# Altium PCB SE-HV00-02.PcbDoc
Units mm, origin at the board's own origin, x right, y up, seen from the top; angles counter-clockwise.
Board outline 120 x 99.9 mm, 2 copper layers (Top Layer, Bottom Layer); 131 components, 77 nets, 419 pads, 89 vias.
Unrouted connection lines stored in the file: 151.
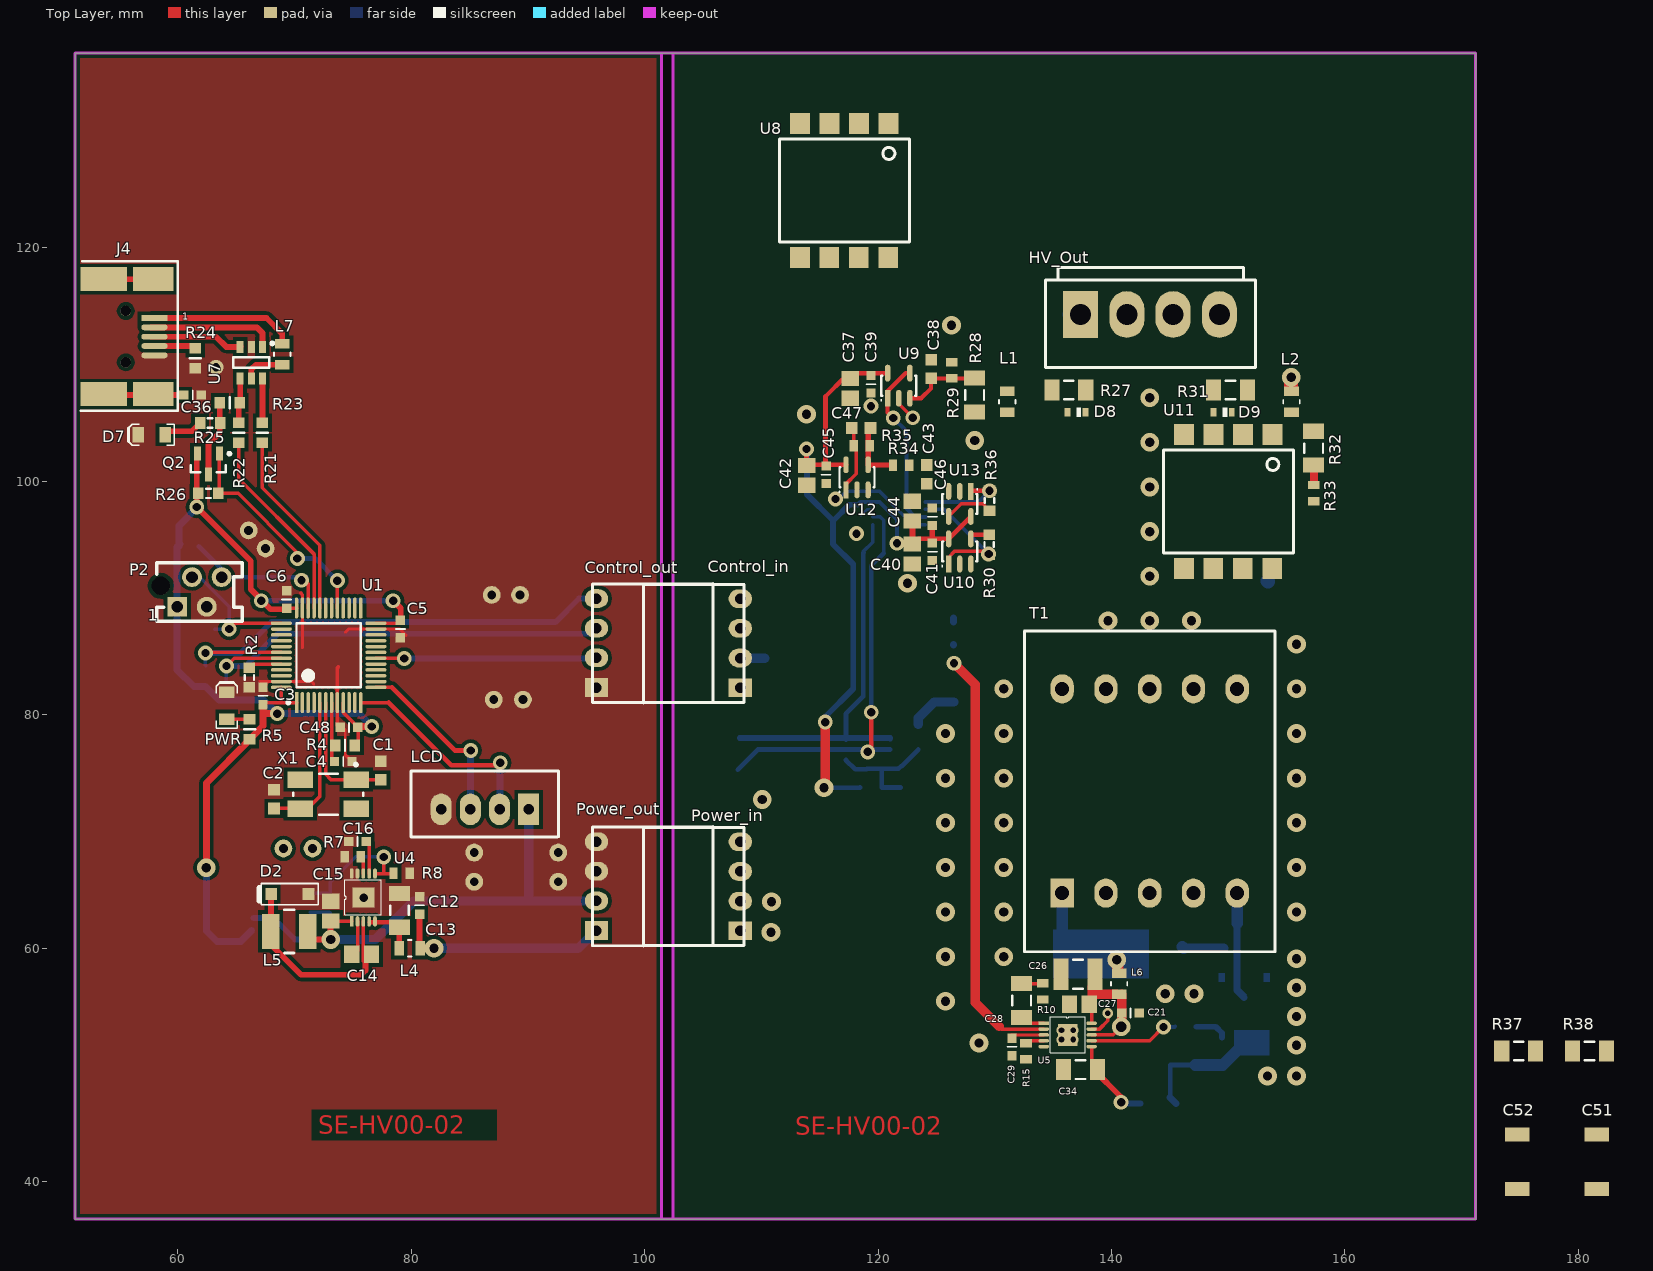
[diagram p0: Top Layer view]
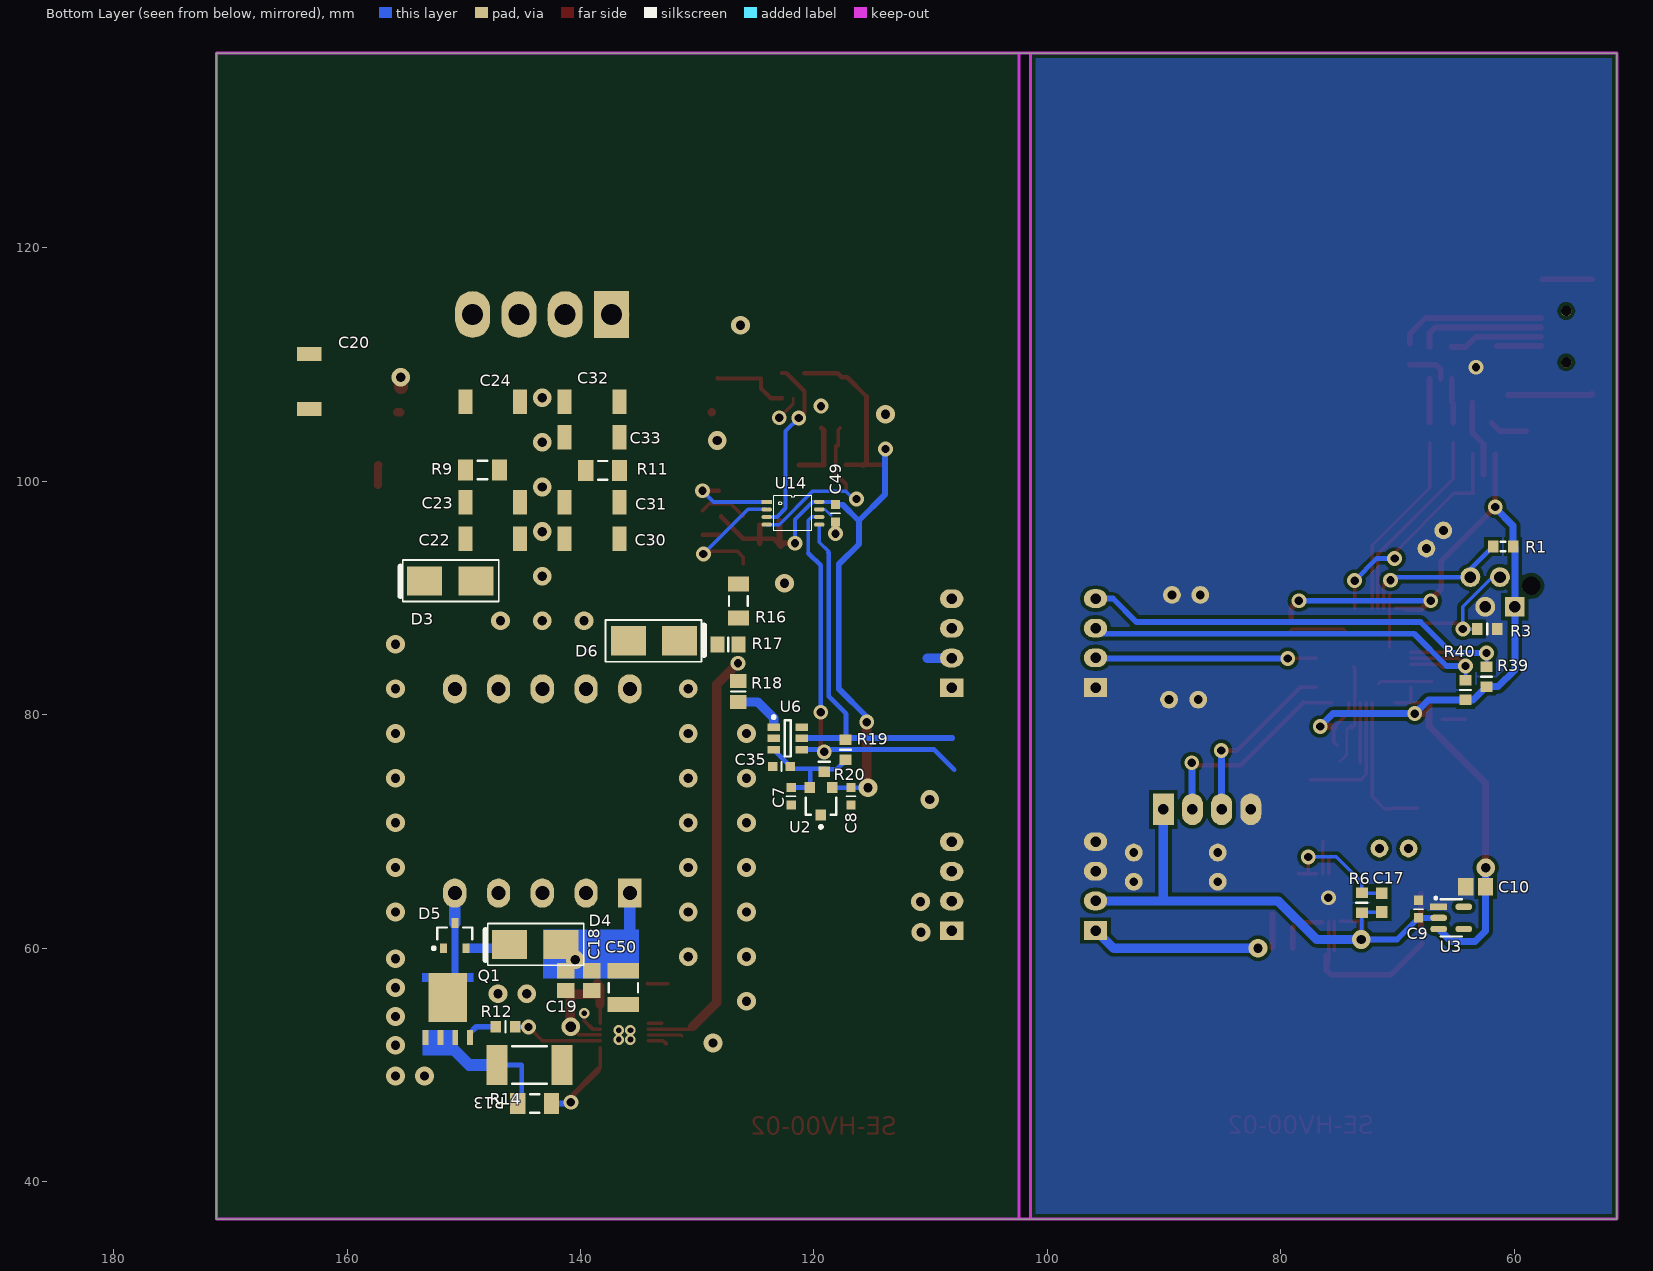
[diagram p1: Bottom Layer view, seen from below]
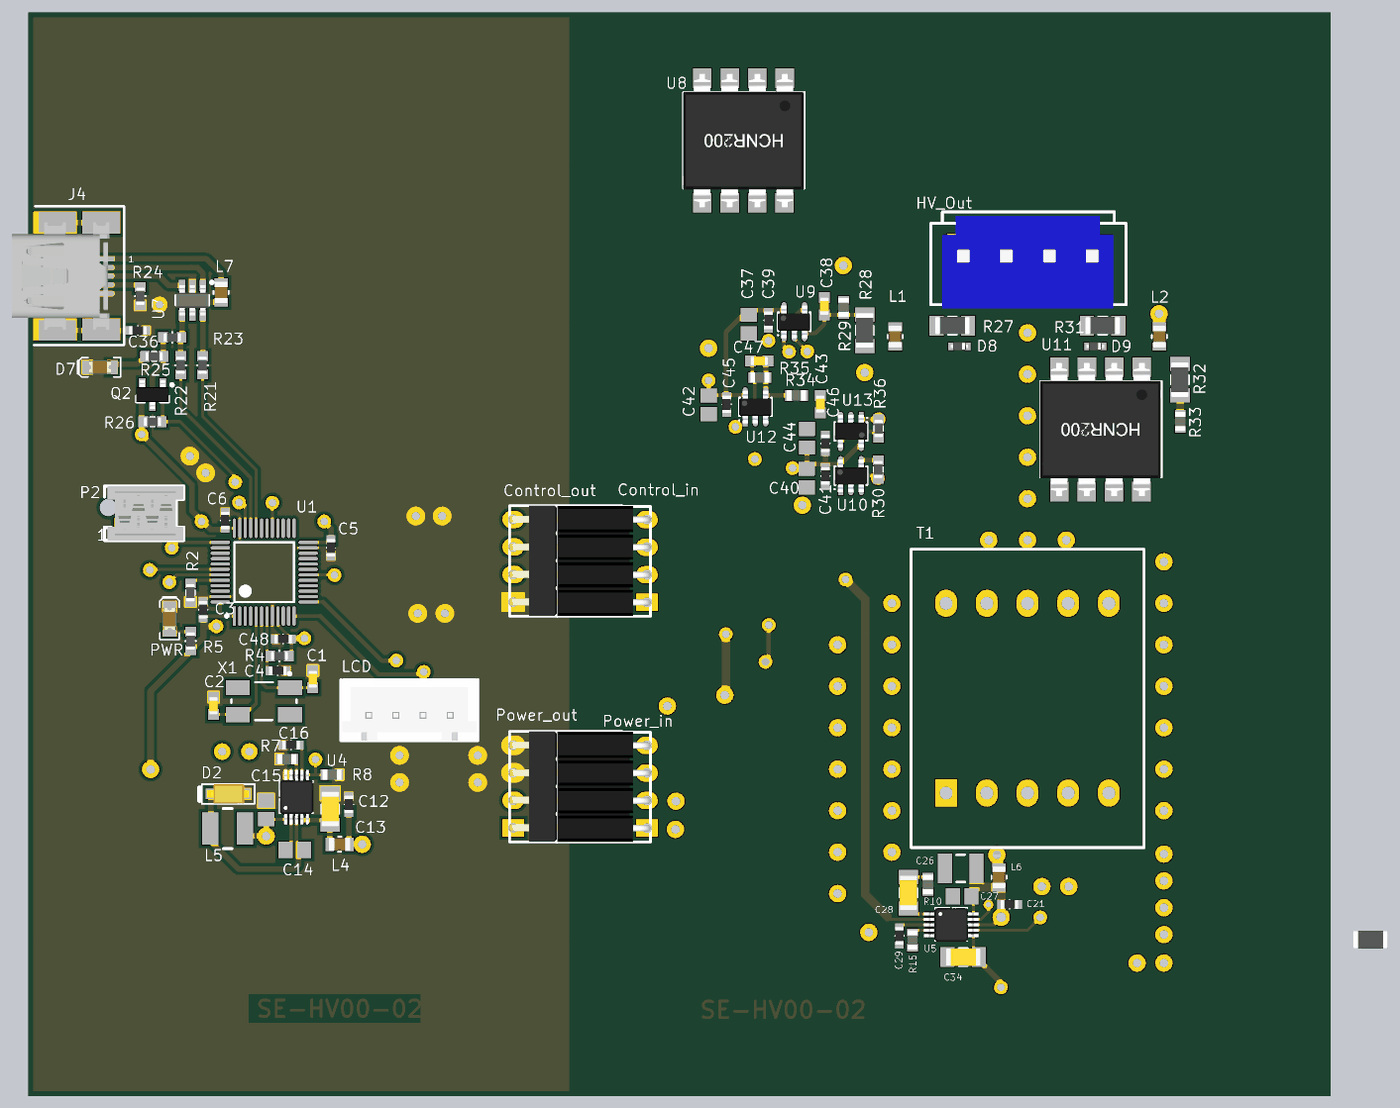
[diagram p2: 3D render of the assembled board from above, using the file's embedded part models]
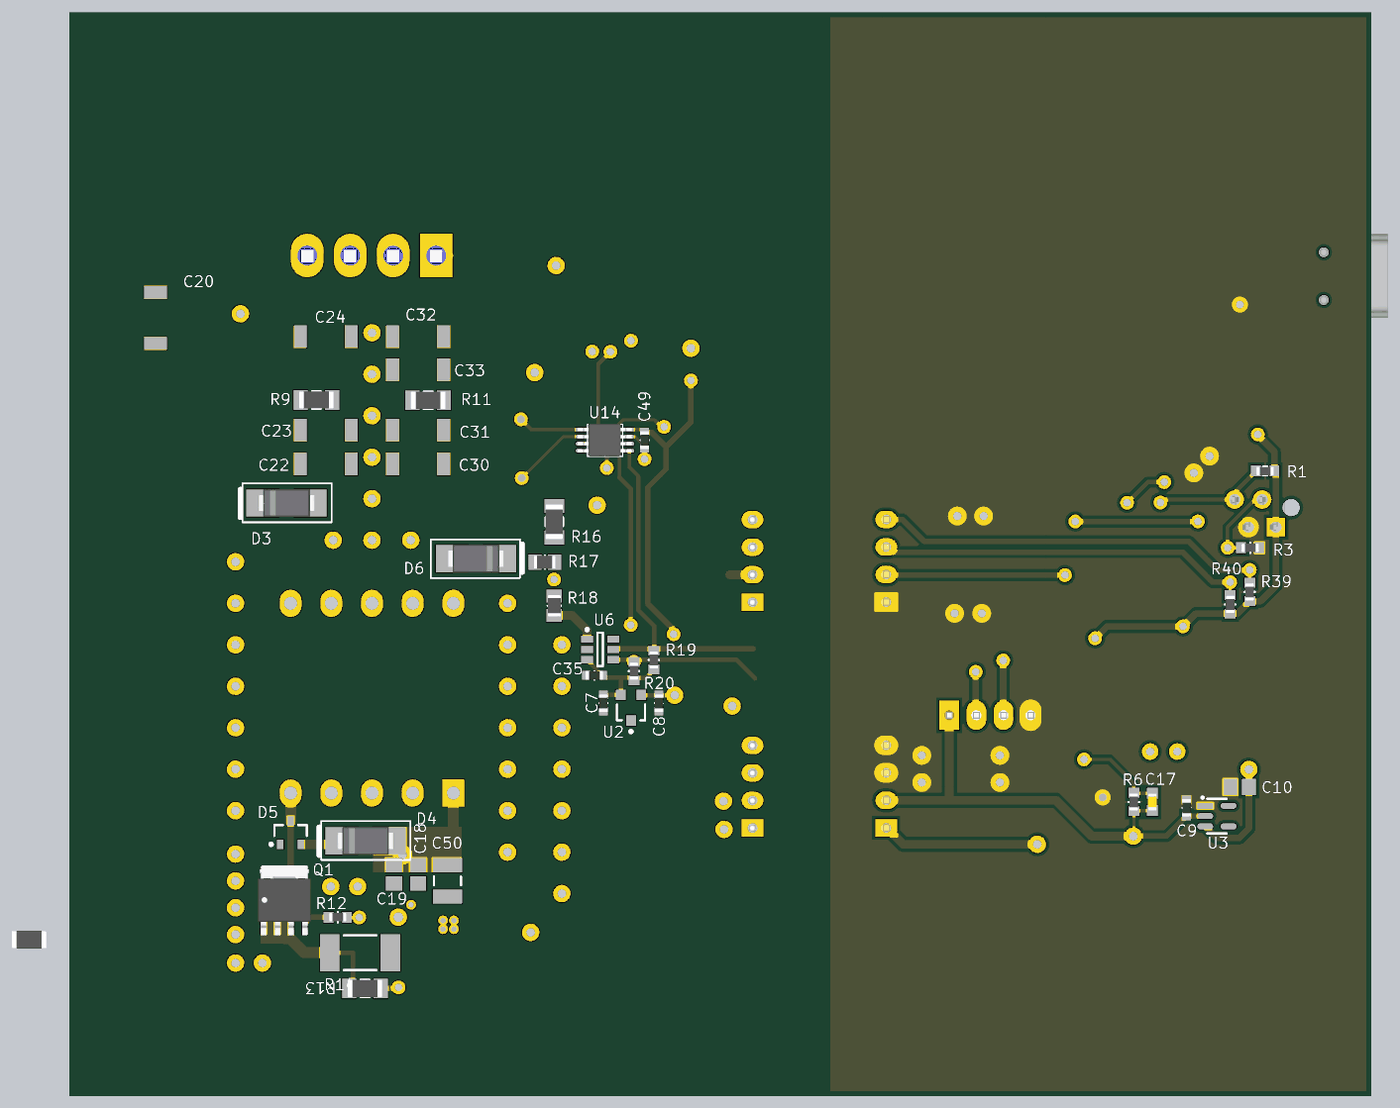
[diagram p3: 3D render of the assembled board from below, using the file's embedded part models]

## Layer stack, top to bottom
Top Solder: solder mask 0.0102, Solder Resist, Dk 3.5
Top Layer: signal copper 0.0356
Dielectric 1: dielectric 0.32, FR-4, Dk 4.8
Bottom Layer: signal copper 0.0356
Bottom Solder: solder mask 0.0102, Solder Resist, Dk 3.5

## Board outline
51.2,36.8 51.2,136.7 171.2,136.7 171.2,36.8
cut-out: 101.45,36.8 101.45,136.7 102.45,136.7 102.45,36.8

## Design rules (kind name [scope] priority, off if disabled: settings)
Clearance Clearance_1 [All vs InNetClass('HV')] p1: gap=0.1
Clearance Clearance_2 [All vs InNetClass('HV1')] p2: gap=0.1
Clearance [All] p3: gap=0.2
HoleSize [All] p1: absolutevalues=TRUE maxlimit=3 minlimit=0.025 maxpercent=80.000 minpercent=20.000
PlaneConnect [All] p1: planeconnectstyle=Relief reliefexpansion=0.508 reliefentries=4 reliefconductorwidth=0.454 reliefairgap=0.254
PolygonConnect [All] p1: connectstyle=Direct reliefconductorwidth=0.254 reliefentries=4 polygonreliefangle="90 Angle" airgapwidth=0.254
RoutingVias [All] p1: holewidth=0.711 width=1.27 viastyle="Through Hole" minholewidth=0.711 minwidth=1.27 maxholewidth=0.711 maxwidth=1.27
SolderMaskExpansion [All] p1: expansion=0.102
UnpouredPolygon [All] p1: allowunpoured=FALSE
Width [All] p1: maxlimit=3 minlimit=0.1 preferedwidth=0.254 minimp=50.000000 maximp=50.000000 favimp=50.000000
27 further rules are at their usual default settings.

## Classes and differential pairs
component class USB: C36 D7 J4 L7 Q2 R21 R22 R23 R24 R25 R26 U7
component class Step_Down: C12 C13 C14 C15 C16 C17 D2 L4 L5 R6 R7 R8 U4
component class SE-HV00-02: C20 C33 Control_in Control_out HV_Out L1 L2 LCD Power_in Power_out
component class Current_Voltage_measure: C37 C38 C39 C40 C41 C42 C43 C44 C45 C46 C47 C49 C51 C52 D8 D9 R28 R29 R30 R32 R33 R34 R35 R36 U8 U9 U10 U11 U12 U13 U14
component class Control: C1 C2 C3 C4 C5 C6 C9 C10 C48 P2 PWR R1 R2 R3 R4 R5 R39 R40 U1 U3 X1
net class HV: NetC20_2 NetC22_2 NetC24_2 NetC33_2 NetC51_2 NetC52_2 NetD3_2 NetD8_2 NetD9_1 NetR16_1
net class HV1: NetC30_2 NetC32_2 NetD6_1
component class High_Voltage_Converter: C7 C8 C18 C19 C21 C22 C23 C24 C26 C27 C28 C29 C30 C31 C32 C34 C35 C50 D3 D4 D5 D6 L6 Q1 R9 R10 R11 R12 R13 R14 R15 R16 R17 R18 R19 R20 R27 R31 R37 R38 T1 U2 U5 U6

## Components (designator, comment, footprint, x,y, rotation, side; value= is the part's Value field where it differs from the comment)
C1 "18pF" CAPC1608N 77.4,75.225 r270 top
C2 "18pF" CAPC1608N 68.25,72.775 r270 top
C3 "100nF" C0603V 67.3,81.625 r270 top
C4 "100nF" C0603V 74.175,76 r180 top
C5 "100nF" C0603V 79.075,87.35 r90 top
C6 "100nF" C0603V 69.325,89.875 r270 top
C7 "100nF" C0603V 121.95,73.025 r90 bottom
C8 "100nF" C0603V 116.825,73.025 r90 bottom
C9 "100nF" C0603V 68.2,63.35 r270 bottom
C10 "1uF" CAPC2012N 63.3,65.275 r180 bottom
C12 "100nF" C0603V 80.725,63.675 r270 top
C13 "10uF" CAPC3216N 79,63.25 r90 top
C14 "0.47uF" CAPC2012N 75.75,59.475 r180 top
C15 "47uF" CAPC2012N 73.1,63.175 r270 top
C16 "100nF" C0603V 75.4,69.15 r0 top
C17 "10pF" CAPC1608N 71.35,63.9 r270 bottom
C18 "1uF" CAPC2012N 139.025,57.225 r270 bottom
C19 "1uF" CAPC2012N 141.25,57.225 r270 bottom
C20 "100nF" C1808 163.225,108.55 r90 bottom
C21 "100nF" C0603V 141.625,54.45 r180 top
C22 "100nF" C1808 147.525,95.075 r0 bottom
C23 "100nF" C1808 147.525,98.2 r0 bottom
C24 "100nF" C1808 147.525,106.825 r0 bottom
C26 "47uF" CAPC3225N 137.125,57.775 r180 top
C27 "1uF" CAPC2012N 137.25,55.2 r180 top
C28 "680pF" CAPC3216N 132.3,55.525 r270 top
C29 "100nF" C0603V 131.475,51.55 r270 top
C30 "100nF" C1808 139.025,95.075 r180 bottom
C31 "100nF" C1808 139.025,98.2 r180 bottom
C32 "100nF" C1808 139.025,106.825 r180 bottom
C33 "100nF" C1808 139.025,103.775 r180 bottom
C34 "10nF" CAPC3216N 137.35,49.6 r0 top
C35 "100nF" C0603V 122.775,75.575 r180 bottom
C36 "100nF" C0603V 61.275,107.4 r180 top
C37 "1uF" CAPC2012N 117.6,107.975 r270 top
C38 "10pF" CAPC1608N 124.55,109.625 r270 top
C39 "100nF" C0603V 119.4,108.325 r90 top
C40 "1uF" CAPC2012N 122.925,93.775 r270 top
C41 "100nF" C0603V 124.65,93.975 r90 top
C42 "1uF" CAPC2012N 113.9,100.525 r270 top
C43 "10pF" CAPC1608N 124.175,100.6 r90 top
C44 "1uF" CAPC2012N 122.95,97.45 r90 top
C45 "100nF" C0603V 115.55,100.575 r90 top
C46 "100nF" C0603V 124.65,96.975 r270 top
C47 "10pF" CAPC1608N 118.55,104.575 r0 top
C48 "100nF" C0603V 74.675,78.925 r0 top
C49 "100nF" C0603V 118.15,97.275 r270 bottom
C50 "47uF" CAPC3225N 136.325,56.625 r90 bottom
C51 "100nF" C1808 181.559,41.702 r90 top
C52 "100nF" C1808 174.784,41.702 r90 top
Control_in "4 Pin Socket" "RA SOCKET 4 PIN" 108.2,82.325 r90 top
Control_out "HDR 4 Pin" "RA HDR 4PIN" 95.875,86.15 r90 top
D2 "PMEG3010ER" SOD123 69.6,64.65 r0 top
D3 "STTH1R06A" DO-214AC 151.15,91.475 r0 bottom
D4 "SMAJ300A" DO-214AC 143.875,60.325 r0 bottom
D5 "BAV99" SOT95P240-3L 150.775,61.075 r90 bottom
D6 "STTH1R06A" DO-214AC 133.7,86.35 r180 bottom
D7 "KPHCM-2012SGC-T" D0805 57.775,104 r180 top
D8 "BAS516" SOD523 137,105.925 r0 top
D9 "BAS516" SOD523 149.525,105.925 r0 top
HV_Out "HDR 4" HDR1X4_3M96V 143.3,114.3 r0 top
J4 "USB MINI-B" MOLEX_MINI_USB-B 55.825,112.4 r0 top
L1 "" LL0805\2P 131.075,106.825 r90 top
L2 "" LL0805\2P 155.425,106.825 r90 top
L4 "FB 1.5k 1A" LL0805\2P 79.875,60 r180 top
L5 "10uH" L1515 69.55,61.45 r0 top
L6 "FB 1.5k 1A" LL0805\2P 140.65,56.95 r90 top
L7 "" LL0805\2P 68.95,110.9 r90 top
LCD "B4B-XH-A" B4B-XH-A 88.8,71.9 r180 top
P2 "7-215079-4" ZIP-T4 62.425,90.525 r0 top
Power_in "4 Pin Socket" "RA Socket 4 pin" 108.2,61.5 r90 top
Power_out "HDR 4 Pin" "RA HDR 4PIN" 95.875,65.325 r90 top
PWR "KPHCM-2012SGC-T" D0805 64.2,80.775 r90 top
Q1 "PSMN069-100YS" SOT669 151.375,55.05 r180 bottom
Q2 "NDS332P" SOT23-3L 62.625,101.475 r270 top
R1 "10k" RESC1608N 60.95,94.425 r0 bottom
R2 "100k" RESC1608N 66.125,83.2 r270 top
R3 "10k" RESC1608N 62.325,87.35 r180 bottom
R4 "100k" RESC1608N 74.325,77.375 r0 top
R5 "100R" RESC1608N 66.15,78.75 r270 top
R6 "1M6" RESC1608N 73.05,63.9 r270 bottom
R7 "118k" RESC1608X50N 75,67.85 r180 top
R8 "309k" RESC1608X50N 79.175,66.425 r180 top
R9 "75R" RESC3216N 148.4,100.975 r180 bottom
R10 "22k" RESC1608X50N 134.1,56.3 r90 top
R11 "75R" RESC3216N 138.1,100.95 r0 bottom
R12 "10R" RESC1608N 146.425,53.275 r0 bottom
R13 "22R" RESC3216N 143.925,46.7 r0 bottom
R14 "0R05" RESC6432AN 144.375,50 r0 bottom
R15 "140k" RESC1608X50N 132.675,51.175 r90 top
R16 "1M2" RESC3216N 126.475,89.75 r90 bottom
R17 "11k3" RESC2012N 127.35,86.025 r180 bottom
R18 "15k" RESC2012N 126.475,82 r90 bottom
R19 "10k" RESC1608N 117.3,77 r270 bottom
R20 "10k" RESC1608N 119.125,75.975 r270 bottom
R21 "22R" RESC1608N 67.25,104.175 r270 top
R22 "22R" RESC1608N 65.225,104.175 r270 top
R23 "1k0" RESC1608N 64.45,106.75 r0 top
R24 "100k" RESC1608N 61.5,110.55 r90 top
R25 "1k0" RESC1608N 62.775,105 r0 top
R26 "10k" RESC1608N 62.625,98.975 r180 top
R27 "75R" RESC3216N 136.35,107.825 r0 top
R28 "1M2" RESC3216N 128.275,107.4 r270 top
R29 "12k" RESC1608X50N 126.325,109.525 r270 top
R30 "30k" RESC1608N 129.525,94.575 r270 top
R31 "75R" RESC3216N 150.2,107.825 r180 top
R32 "1M2" RESC3216N 157.325,102.85 r90 top
R33 "14k" RESC1608X50N 157.35,99 r90 top
R34 "100k" RESC1608X50N 121.975,101.4 r0 top
R35 "100k" RESC1608X50N 118.6,103.05 r180 top
R36 "30k" RESC1608N 129.55,98.35 r90 top
R37 "75R" RESC3216N 174.884,51.202 r0 top
R38 "75R" RESC3216N 180.959,51.202 r0 top
R39 "10k" RESC1608N 62.375,83.275 r90 bottom
R40 "10k" RESC1608N 64.175,82.125 r90 bottom
T1 "EFD20" EFD_20 143.275,73.475 r0 top
U1 "STM32F103C6T6" LQFP48_N 72.925,85.1 r90 top
U2 "MAX6104EUR+T" SOT23-3 118.45,73.775 r0 bottom
U3 "TLV70433DBVT" SO-G5/P.95 65.4,62.6 r270 bottom
U4 "LT3991" "10-LEAD PLASTIC MSOP - DUPLICATE" 74.9,62.3 r90 top
U5 "LT3757" "10-LEAD PLASTIC MSOP - DUPLICATE" 134.2,53.575 r0 top
U6 "MCP4725A0T-E/CH" SOT-23-CH6_N 122.25,77.975 r180 bottom
U7 "USBLC6-2SC6" SOT95P280X145-6N 66.3,110.175 r270 top
U8 "6N136" SMP-8 120.9,130.65 r270 top
U9 "MCP6001T-I/OT" SO-G5/X.45 121.775,108.2 r0 top
U10 "MCP6001T-I/OT" SO-G5/X.45 127,94 r0 top
U11 "6N136" SMP-8 153.8,104 r270 top
U12 "MCP6001T-I/OT" SO-G5/X.45 118.2,100.35 r0 top
U13 "MCP6001T-I/OT" SO-G5/X.45 127,98.075 r180 top
U14 "MAX11612EUA" UMAX-8 124.05,98.25 r180 bottom
X1 "8 MHz" 2SMX-3SMXB 72.9,73.2 r180 top

## Footprints (in the part's own frame and the unit in brackets; to place one, negate y for a bottom-side part, rotate by r counter-clockwise, add the part's x,y. Pads: shape width x height; smd on the part's side, far side on the other; paste and mask are expansions set on the pad)
2SMX-3SMXB [mm] "Quartz Crystal, SM; Body 6.0 x 3.5 mm (LxW)"
  rect 2.2x1.4 smd: 1(-2.4,-1.25) 2(2.4,-1.25) 3(2.4,1.25) 4(-2.4,1.25)
  silkscreen extent -3,-2.66 3,1.75, body extent -3.01,-1.76 3.01,1.76, height 1
"10-LEAD PLASTIC MSOP - DUPLICATE" [mm] "MSOP_10"
  rect 0.889x0.305 smd: 1(0,0)
  oval 0.889x0.305 smd: 2(0,-0.5) 3(0,-1) 4(0,-1.5) 5(0,-2) 6(4.1,-2) 7(4.1,-1.5) 8(4.1,-1) 9(4.1,-0.5) 10(4.1,0)
  rect 1.68x1.88 smd: GND(2.05,-1)
  silkscreen extent 0.55,-2.52 3.55,0.58, body extent -0.47,-2.55 4.57,0.55, height 1.11
B4B-XH-A [mm]
  rect 1.8x2.7 hole 0.9: 1(-1.27,0)
  oval 1.8x2.7 hole 0.9: 2(1.23,0) 3(3.73,0) 4(6.23,0)
  silkscreen extent -3.81,-3.3 8.81,2.35, body extent -3.71,-3.4 8.69,2.35, height 7
C0603V [mm]
  rect 0.8x0.8 smd paste+0 mask+0.05: 1(-0.75,0) 2(0.75,0)
  silkscreen extent 0,-0.4 0,0.4, body extent -0.8,-0.4 0.8,0.4, height 0.4
C1808 [mm]
  rect 1.2x2.1 smd paste-0.02 mask+0.075: 1(-2.35,0) 2(2.35,0)
CAPC1608N [mm] "Chip Capacitor, Body 1.6x0.8mm(0603), IPC Medium Density"
  rect 1x1 smd: 1(-0.8,0) 2(0.8,0)
  body extent -0.8,-0.4 0.8,0.4, height 0.55
CAPC2012N [mm] "Chip Capacitor, Body 2.0x1.3mm(C0805), IPC Medium Density"
  rect 1.3x1.5 smd: 1(-0.85,0) 2(0.85,0)
  body extent -1.1,-0.72 1.1,0.72, height 1.1
CAPC3216N [mm] "Chip Capacitor, Body 3.2x1.6mm, IPC Medium Density"
  rect 1.3x1.8 smd: 1(-1.45,0) 2(1.45,0)
  silkscreen extent -0.4,-0.8 0.4,0.8, body extent -1.6,-0.8 1.6,0.8, height 0.7
CAPC3225N [mm] "Chip Capacitor, Body 3.2x2.5mm, IPC Medium Density"
  rect 1.3x2.7 smd: 1(-1.45,0) 2(1.45,0)
  silkscreen extent -0.4,-1.25 0.4,1.25, body extent -1.7,-1.35 1.7,1.35, height 1.35
D0805 [mm]
  rect 1x1.3 smd paste-0.02 mask+0.05: 1(-1.15,0) 2(1.15,0)
  silkscreen extent -1.91,-0.89 2,0.89, body extent -1.01,-0.62 1.01,0.63, height 1.1
DO-214AC [mm] "(HSMA) (High Profile)"
  rect 3x2.5 smd: 1(-2.2,0) 2(2.2,0)
  silkscreen extent -4.15,-1.8 4.27,1.78, body extent -2.6,-1.3 2.6,1.3, height 2.4
EFD_20 [mm] "EFD20"
  rect 2x2.5 hole 1.2: 1(-7.5,-8.75)
  oval 2x2.5 hole 1.2: 2(-3.75,-8.75) 3(0,-8.75) 4(3.75,-8.75) 5(7.5,-8.75) 6(7.5,8.75) 7(3.75,8.75) 8(0,8.75) 9(-3.75,8.75) 10(-7.5,8.75)
  silkscreen extent -10.73,-13.77 10.75,13.72, body extent -10.7,-13.77 10.7,13.73, height 11.02
HDR1X4_3M96V [mm]
  rect 3x4 hole 1.8: 1(-5.94,0)
  oval 3x4 hole 1.8: 2(-1.98,0) 3(1.98,0) 4(5.94,0)
  silkscreen extent -8.94,-4.53 9.06,4.03, body extent -7.89,-4.86 7.89,3.64, height 10.9
L1515 [mm] "(3030 metric)"
  rect 1.5x3 smd: 1(-1.6,0) 2(1.6,0)
  silkscreen extent -0.4,-1.85 0.4,1.85
LL0805\2P [mm]
  rect 0.8x1.25 smd: 1(-0.9,0) 2(0.9,0)
  silkscreen extent -0.15,-0.7 0.15,0.7, body extent -1,-0.6 1,0.6, height 0.95
LQFP48_N [mm] "Thin QFP, 48-Leads, Body 7x7mm, Pitch 0.5mm, IPC Medium Density"
  rect 1.8x0.3 smd: 1(-4.05,2.75)
  oval 1.8x0.3 smd: 2(-4.05,2.25) 3(-4.05,1.75) 4(-4.05,1.25) 5(-4.05,0.75) 6(-4.05,0.25) 7(-4.05,-0.25) 8(-4.05,-0.75) 9(-4.05,-1.25) 10(-4.05,-1.75) 11(-4.05,-2.25) 12(-4.05,-2.75) 25(4.05,-2.75) 26(4.05,-2.25) 27(4.05,-1.75) 28(4.05,-1.25) 29(4.05,-0.75) 30(4.05,-0.25) 31(4.05,0.25) 32(4.05,0.75) 33(4.05,1.25) 34(4.05,1.75) 35(4.05,2.25) 36(4.05,2.75)
  oval 0.3x1.8 smd: 13(-2.75,-4.05) 14(-2.25,-4.05) 15(-1.75,-4.05) 16(-1.25,-4.05) 17(-0.75,-4.05) 18(-0.25,-4.05) 19(0.25,-4.05) 20(0.75,-4.05) 21(1.25,-4.05) 22(1.75,-4.05) 23(2.25,-4.05) 24(2.75,-4.05) 37(2.75,4.05) 38(2.25,4.05) 39(1.75,4.05) 40(1.25,4.05) 41(0.75,4.05) 42(0.25,4.05) 43(-0.25,4.05) 44(-0.75,4.05) 45(-1.25,4.05) 46(-1.75,4.05) 47(-2.25,4.05) 48(-2.75,4.05)
  silkscreen extent -4.17,-2.75 2.75,3.57, body extent -3.5,-3.5 3.5,3.5, height 1.6
MOLEX_MINI_USB-B [mm]
  rect 2.25x0.5 smd paste-0.02 mask+0.025: 1(2.175,1.6)
  oval 2.25x0.5 smd paste-0.02 mask+0.025: 2(2.175,0.8) 3(2.175,0) 4(2.175,-0.8) 5(2.175,-1.6)
  rect 3.5x2.05 smd paste-0.02 mask+0.075: 6(2.075,-4.925) 8(2.075,4.925)
  rect 4x2.05 smd paste-10 mask+0.075: 7(-2.175,-4.925) 9(-2.175,4.925)
  round 0.9 / inner round 1.2 / far side round 0.9 hole 0.9 unplated: H1(-0.275,2.2) H2(-0.275,-2.2)
  silkscreen extent -4.13,-6.35 4.18,6.45, body extent -6.17,-4.95 2.83,4.95, height 3.96
"RA HDR 4PIN" [mm]
  rect 1.6x2 hole 0.9: 1(-3.81,0)
  oval 1.6x2 hole 0.9: 2(-1.27,0) 3(1.27,0) 4(3.81,0)
  silkscreen extent -5.11,-9.98 5.09,0.34, body extent -5.07,-10.02 5.09,0.34, height 3.04
"RA SOCKET 4 PIN" [mm]
  rect 1.6x2 hole 0.9: 1(0,0)
  oval 1.6x2 hole 0.9: 2(2.54,0) 3(5.08,0) 4(7.62,0)
  silkscreen extent -1.3,-0.32 8.86,8.28, body extent -1.28,-0.32 8.88,8.28, height 3.27
"RA Socket 4 pin" [mm]
  rect 1.6x2 hole 0.9: 1(0,0)
  oval 1.6x2 hole 0.9: 2(2.54,0) 3(5.08,0) 4(7.62,0)
  silkscreen extent -1.3,-0.32 8.86,8.28, body extent -1.28,-0.32 8.88,8.28, height 3.27
RESC1608N [mm] "Chip Resistor, Body 1.6x0.8mm, IPC Medium Density"
  rect 0.9x1 smd: 1(-0.85,0) 2(0.85,0)
  silkscreen extent -0.2,-0.4 0.2,0.4, body extent -0.8,-0.4 0.8,0.4, height 0.38
RESC1608X50N [mm] "Chip Resistor, EIA 0603, Metric 1608, Body 1.6x0.8mm, IPC Medium Density"
  rect 0.72x0.99 smd: 1(-0.69,0) 2(0.69,0)
  body extent -0.87,-0.47 0.88,0.48, height 0.5
RESC2012N [mm] "Chip Resistor, Body 2.0x1.3mm, IPC Medium Density"
  rect 1.2x1.4 smd: 1(-0.9,0) 2(0.9,0)
  silkscreen extent 0,-0.6 0,0.6, body extent -1,-0.6 1,0.6, height 0.5
RESC3216N [mm] "Chip Resistor, Body 3.2x1.6mm, IPC Medium Density"
  rect 1.3x1.8 smd: 1(-1.45,0) 2(1.45,0)
  silkscreen extent -0.4,-0.8 0.4,0.8, body extent -1.6,-0.8 1.6,0.8, height 0.6
RESC6432AN [mm] "Chip Resistor, Body 6.4x3.2mm, IPC Medium Density"
  rect 1.8x3.4 smd: 1(-2.8,0) 2(2.8,0)
  silkscreen extent -1.5,-1.6 1.5,1.6, body extent -3.32,-1.73 3.32,1.73, height 1.1
SMP-8 [mm] "8 pin DIP surface mount package"
  rect 1.8x1.7 smd: 1(0,0) 2(0,-2.525) 3(0,-5.05) 4(0,-7.6) 5(11.475,-7.6) 6(11.475,-5.075) 7(11.475,-2.55) 8(11.475,-0.025)
  silkscreen extent 1.33,-9.33 10.12,1.8, body extent -0.4,-9.37 11.9,1.78, height 4.75
SO-G5/P.95 [mm] "SOT-23/SC-74A; 5 Leads; Body 3.1 x 3 mm, inc. leads (LxW max)"
  rect 0.55x1.45 smd: 1(-0.95,-1.075)
  oval 0.55x1.45 smd: 2(0,-1.075) 3(0.95,-1.075) 4(0.95,1.075) 5(-0.95,1.075)
  silkscreen extent -1.8,-1.42 1.6,0.9, body extent -1.45,-0.8 1.45,0.8, height 1.45
SO-G5/X.45 [mm] "SOT-23/SC-74A; 5 Leads; Body 3.1 x 3 mm, inc. leads (LxW max)"
  rect 0.45x1.45 smd: 1(-0.95,-1.075)
  oval 0.45x1.45 smd: 2(0,-1.075) 3(0.95,-1.075) 4(0.95,1.075) 5(-0.95,1.075)
  silkscreen extent -1.55,-1.3 1.5,0.85, body extent -1.5,-1.52 1.5,1.48, height 1.3
SOD123 [mm]
  rect 1x1 smd paste-0.02 mask+0.05: 1(1.6,0) 2(-1.6,0)
  silkscreen extent -2.63,-0.91 2.44,0.89, body extent -1.95,-0.9 1.95,0.9, height 1.29
SOD523 [mm]
  rect 0.5x0.7 smd: 1(-0.775,0) 2(0.775,0)
  silkscreen extent 0,-0.4 0.4,0.4, body extent -0.8,-0.4 0.8,0.4, height 0.7
SOT23-3 [mm]
  rect 0.9x0.95 smd: 1(0,0) 2(1.9,0) 3(0.95,2.35)
  silkscreen extent -0.35,0.87 2.25,3.5
SOT23-3L [mm] "SOT23, 3-Leads, Body 2.9x1.3mm, Pitch 0.95mm, Lead Span 2.5mm, IPC High Density"
  rect 1.2x0.6 smd: 1(-0.9,0.95) 2(-0.9,-0.95) 3(0.9,0)
  silkscreen extent -1.02,-1.5 0.7,1.93, body extent -1.32,-1.5 1.32,1.5, height 1.08
SOT95P240-3L [mm] "SOT23, 3-Leads, Body 2.9x1.3mm, Pitch 0.95mm, Lead Span 2.4mm, IPC High Density"
  rect 0.85x0.6 smd: 1(-1.075,0.95) 2(-1.075,-0.95) 3(1.075,0)
  silkscreen extent -1.2,-1.5 0.7,1.93, body extent -0.7,-1.5 0.7,1.5, height 1.12
SOT95P280X145-6N [mm] "SOT23, 6-Leads, Body 1.6x3.0mm, Pitch 0.95mm, IPC Medium Density"
  rect 1.05x0.6 smd: 1(-1.35,0.95) 2(-1.35,0) 3(-1.35,-0.95) 4(1.35,-0.95) 5(1.35,0) 6(1.35,0.95)
  silkscreen extent -1.77,-1.55 0.45,1.92, body extent -1.4,-1.5 1.4,1.5, height 1.45
SOT669 [mm]
  rect 0.5x1.3 smd: 1(-1.905,-2.7) 2(-0.635,-2.7) 3(0.635,-2.7) 4(1.905,-2.7)
  rect 3.3x4.2 smd: 5(0,0.75)
  Top Layer region: 1.65,2.85 2.205,2.85 2.205,2.05 1.65,2.05
  Top Layer region: -2.205,2.85 -1.65,2.85 -1.65,2.05 -2.205,2.05
  body extent -2.43,-3.43 2.47,3, height 1.15
SOT-23-CH6_N [mm] "SOT23, 6-Leads, Body 2.9x1.6mm, Pitch 0.95mm, Lead Span 2.7mm, IPC Medium Density"
  rect 1.1x0.65 smd: 1(-1.2,0.95) 2(-1.2,0) 3(-1.2,-0.95) 4(1.2,-0.95) 5(1.2,0) 6(1.2,0.95)
  silkscreen extent -1.33,-1.55 0.25,1.95, body extent -0.9,-1.55 0.9,1.55, height 1.45
UMAX-8 [mm]
  rect 0.9x0.35 smd: 1(0,0)
  oval 0.9x0.35 smd: 2(0,-0.65) 3(0,-1.3) 4(0,-1.95) 5(4.5,-1.95) 6(4.5,-1.3) 7(4.5,-0.65) 8(4.5,0)
  silkscreen extent 0.63,-2.47 3.88,0.5, body extent -0.28,-2.47 4.73,0.53, height 0.95
ZIP-T4 [mm] "In-Line; 6 Zig-Zag Leads; Body 20 x 3.25mm; Pitch 1.7 mm"
  rect 1.7x1.7 hole 1: 1(-2.475,-1.27)
  round 1.7 hole 1: 2(-1.205,1.27) 3(0.065,-1.27) 4(1.335,1.27)
  round 1.5 hole 1.6 unplated: 20(-3.875,0.53)
  silkscreen extent -4.22,-2.5 3.08,2.5, body extent -3.96,-2.5 3.05,2.5, height 4

## Part data
C1 C2: library part C0000124, "MLCC, 18 pF, ± 5%, C0G / NP0, 50 V, 0603"
C3 C4 C5 C6 C7 C8 C9 C12 C16 C21 C29 C35 C36 C39 C41 C45 C46 C48 C49: library part C0000005, "MLCC, 0.1uF 16V 10% X7R 0603"
C10 C18 C19 C27: library part C0000037, "MLCC, 0805, X5R, 16V, 1UF"
C13: library part C0000006, "MLCC, 10uF, 16V, 10%, 1206"
C14: library part C0000094, "MLCC,0.47uF,50V, 0805,"
C15: library part C0000094, "MLCC,47uF,50V, 0805,"
C17 C38 C43 C47: library part C0000042, "MLCC, 0603, NP0, 50V, 10PF"
C20 C22 C23 C24 C30 C31 C32 C33 C51 C52: library part C0000111, "MLCC, X7R, 100NF, 630V, 1808"
C26 C50: library part C0000077, "MLCC, 1210, 47uF, 16V"
C28: library part C0000056, "MLCC, 680PF, 630V, C0G/NP0, 1206"
C34: library part C0000012, "MLCC, 10nF, 630V, ±10% ,X7R, 1206"
C37 C40 C42 C44: library part C0000037, "MLCC, 0805, X5R, 16V, 1uF"
Control_in Power_in: library part "Right angle socket conn 2.54, single row", "Right angle socket conn 2.54mm single row"
Control_out Power_out: library part "Right angle haeder 2.54 mm single row", "Right angle haeder 2.54 mm single row"
D2: library part D0000058, "1A, 30V"
D3 D6: library part D0000024, "DIODE, fast, 1A, 600V, SMD, SMA"
D4: library part D0000021, "TVS DIODE, 400W, 300V, DO-214AC"
D5: library part D0000001, "DIODE SW DUAL 75V 350mW SOT23"
D7 PWR: library part D0000030, "LED, SMD, 0805, GREEN, 25mcd"
D8 D9: library part D0000081, "DIODE, SWITCHING, SOD-523"
HV_Out: library part J0000151, "CONNECTOR, 4 way , HEADER, THT, 3.96MM,10A,250Vac"
J4: library part J0000002, "USB MINI-B SMT connector"
L1 L2 L7: library part L0000002, "BEAD SMD EMI FERRITE 0805 220 OHM"
L4 L6: library part L0000004, "BEAD FERRITE, SMD 1500OHM, 0805"
L5: library part L0000071, "INDUCTOR, SMD, 4X4MM, 10UH, 20%"
LCD: library part J0000086, "Wire to Board Header, THT, 2.5MM, 4WAY"
P2: library part J0000107, "Micro-match SOCKET, TOP ENTRY, 4WAY PTH, 1.27mm"
Q1: library part Q0000050, "MOSFET 100V, 72.4 mOhm standard level, LFPAK"
Q2: library part Q0000046, "P-Channel Logic Level Enhancement Mode Field Effect Transistor"
R1 R3 R19 R20 R26 R39 R40: library part R0000008, "Res, 10K 0.063W 75V 1%  0603"
R2 R4 R24: library part R2406120, "Res, 100K 5% 0603 1/10W"
R5: library part R2406048, "Res, 100R 5% 0603 1/10W"
R6: library part R2406149, "1M6 5% 0603 1/10W"
R7: library part R0000563, "Res, 118K, 0603 (1608 metric), ±1%, 100mW, 75V"
R8: library part R0000610, "Res, 309K, 0603 (1608 metric), ±1%, 100mW, 75V"
R9 R11 R27 R31 R37 R38: library part R2412045, "75R 5% 1206 1/4W"
R10: library part R0000478, "Res, 22K, 0603 (1608 metric), ±1%, 100mW, 75V"
R12: library part R0000001, "Res, 0603 0.1W 5%"
R13: library part R2412032, "22R 5% 1206 1/4W"
R14: library part R2412183, "Res, 0.05R 1% 2512 1W"
R15: library part R0000571, "Res, 140K, 0603 (1608 metric), ±1%, 100mW, 75V"
R16 R28 R32: library part R0000022, "Res, 1M 0.25W, 1% 1206"
R17 R18: library part R2408097, "Res, 11K 5% 0805 1/8W"
R21 R22: library part R2406032, "Res, 22R 5% 0603 1/10W"
R23 R25: library part R0000006, "Res, thin film 1k  ±5% 0.1W 0603"
R29: library part R0000450, "Res, 12K, 0603 (1608 metric), ±1%, 100mW, 75V"
R30 R36: library part R2406107, "30K 5% 0603 1/10W"
R33: library part R0000457, "Res, 14K, 0603 (1608 metric), ±1%, 100mW, 75V"
R34 R35: library part R0000556, "Res, 100K, 0603 (1608 metric), ±1%, 100mW, 75V"
T1: library part EFD_20, "EFD_20"
U1: "STM32 ARM-based 32-bit MCU with 32 Kbytes Flash, 48-pin LQFP, Industrial Temperature"
U2: "Low-Cost, Micropower, Low-Dropout,  High-Output-Current, SOT23 Voltage References"
U3: library part U0000415, "LDO, 3.3V, 150MA, SOT23-5 Vin - 24V"
U4: "55V, 1.2A Step-Down  Regulator with 2.8µA  Quiescent Current"
U5: "Boost, Flyback, SEPIC and  Inverting Controller"
U6: "12-Bit Digital-to-Analog Converter with EEPROM Memory in SOT-23-6, 6-Pin SOT-23, Extended Temperature, Tape and Reel"
U7: library part D0000115, "DIODE ARRAY, TVS, USB2"
U8 U11: "6N136.SDM  Optocoupler, Transistor Output, 1 Channel, Surface Mount DIP, 8 Pins, 50 mA, 5 kV, 19 %"
U9 U10 U12 U13: "MICROCHIP  MCP6001T-I/OT  Operational Amplifier, Single, 1 Amplifier, 1 MHz, 0.6 V/µs, 1.8V to 6V, SOT-23, 5 Pins"
U14: "MAXIM INTEGRATED PRODUCTS  MAX11612EUA+  Analogue to Digital Converter, Low Power, 12 bit, 94.4 kSPS, Single, 4.5 V, 5.5 V, µMAX"
X1: library part M0000014, "CRYSTAL, 8M, 18PF CL, 6X3.6MM SMT"

## Free pads (board coordinates)
  round 1.524 hole 0.762: 0(66.075,95.8) 0(67.525,94.25) 0(69.05,68.55) 0(71.55,68.55) 0(85.4,65.7) 0(85.4,68.2) 0(86.9,90.275) 0(87.075,81.3) 0(89.325,90.275) 0(89.575,81.3) 0(92.6,65.7) 0(92.6,68.2)

## Via types
v1: diameter 1.6, hole 0.8, Top Layer to Bottom Layer, 51 vias
v2: diameter 1.27, hole 0.711, Top Layer to Bottom Layer, 32 vias
v3: diameter 0.9, hole 0.5, Top Layer to Bottom Layer, 5 vias
v4: diameter 1.6, hole 0.9, Top Layer to Bottom Layer, 1 vias

## Nets (pads, with @x,y where several pads share a name; then routed paths per layer and width w, separated by ;. In a path a pad name is that pad's centre, name@x,y a point inside that pad or via, vN(x,y) a via of type N, cw(c..) or ccw(c..) an arc to the next point about the centre after c; other vN are vias at no path point)
+3.3V: C3.2 C5.2 C6.2 C10.2 C48.2 P2.1 Q2.2 R1.1 R4.2 R5.2 R26.2 R39.1 R40.1 U1.1 U1.9 U1.24 U1.36 U1.48 U3.3 | length 104.2
  Top Layer w0.3: C3.2 67.475,81.05 68.875,81.05 ; U1.48 68.875,81.05 ; C6.2 69.35,89.15 U1.36 ; U1.1 68.875,81.05 ; U1.9 74.175,80.2 75.438,78.938 75.45,78.925 75.45,77.65 R4.2 ; U1.24 C5.2@79.175,87.85
  Top Layer w0.5: Q2.2@61.625,102.325 v2(61.625,97.8) 66.25,93.175 66.25,90.75 67.95,89.05 C6.2@69.325,89.05 ; v2(78.45,89.775) 79.1,89.125 C5.2@79.1,88.35
  Top Layer w0.6: v1(62.45,66.9) 62.45,74.15 R5.2@66.213,77.913 ; R5.2 67.3,79.05 67.3,80.1 ; C3.2 67.3,80.1 ; v2(68.525,80.1) 67.3,80.1 ; C48.2 75.438,78.938 75.5,79 v2(76.625,79)
  Bottom Layer w0.5: v1@62.425,66.925 v1(62.45,66.9) ; v2(67.15,89.775) v2(78.45,89.775)
  Bottom Layer w0.6: R1.1 R1.1@60.1,94.55 ; R1.1@60.1,94.5 60.1,96.2 61.7,97.8 v2(61.625,97.8) ; R1.1@60.175,94.625 R1.1@60.1,94.55 ; v1(62.45,66.9) C10.2 62.45,61.475 63.35,60.575 65.4,60.575 U3.3@66.338,61.512 ; v2(76.625,79) 75.525,80.1 v2(68.525,80.1) 67.35,81.275 R40.1 63.525,81.275 R39.1 61.375,82.425 59.95,83.85 P2.1 59.95,94.4 R1.1@60.1,94.55
+5V: C8.2 C37.1 C39.2 C40.1 C41.2 C42.1 C44.1 C45.2 C46.2 C49.1 Power_in.2 U2.1 U9.5 U10.5 U12.5 U13.5 U14.8 | length 71.9
  Top Layer w0.4: v2(113.875,102.775) 113.875,101.4 C42.1 113.95,101.425 C45.2@115.75,101.425 ; C45.2@115.75,101.35 C45.2@115.75,101.425 ; U12.5 C45.2@115.75,101.425 ; U9.5 117.95,109.275 117.6,108.925 117.151,108.925 115.5,107.274 115.5,101.675 C45.2@115.75,101.425 ; C40.1@122.95,94.575 123.45,95.075 124.65,95.075 U10.5 127.95,96.975 U13.5
  Top Layer w0.5: v2(121.625,94.7) 122.525,94.7 122.575,94.75 122.85,94.475 122.95,94.575 C44.1 ; C41.2 124.65,95.075 C46.2
  Top Layer w0.8: v1(115.375,73.75) 115.475,73.85 v2(115.475,79.375)
  Bottom Layer w0.35: C49.1@118.225,98 118.475,98.25 U14.8 120.125,98.25 121.625,96.75 v2(121.625,94.7)
  Bottom Layer w0.4: v1(115.375,73.75) 118.425,73.75 U2.1 ; v2(115.475,79.375) v2@115.5,79.35 ; v2@115.5,79.1 v2@115.5,79.35 ; v2@115.5,79.85 v2@115.5,79.35
  Bottom Layer w0.5: v2(113.875,102.775) 113.9,102.75 113.9,98.9 116.15,96.65 ; v2@115.5,79.85 117.875,82.225 117.875,92.9 116.15,94.625 116.15,96.65 ; C49.1@118.225,98 117.526,98 116.176,96.65 116.15,96.65
  other v1: 110.875,63.975
+12V: C21.2 C26.1 C27.1 L6.1 Power_in.1 U5.8 U5.10 | length 11
  Top Layer w0.3: U5.8 140.15,52.575 v4(140.85,53.275) ; U5.10 138.3,55.175 C27.1@138.325,55.2
  Top Layer w0.8: C27.1@138.325,55.2 138.325,56.7 C26.1@138.575,56.95 ; 138.55,56.05 L6.1@140.425,56.05 ; v4(140.85,53.275) 140.875,53.3 C21.2 L6.1@140.875,56.05
  other v1: 110.825,61.375
GND: C1.1 C2.1 C3.1 C4.1 C5.1 C6.1 C7.1 C8.1 C9.1 C10.1 C12.1 C13.2 C15.1 C16.1 C18.2 C19.2 C20.1 C21.1 C22.1 C23.1 C24.1 C26.2 C27.2 C29.2 C30.1 C31.1 C32.1 C33.1 C34.1 C35.1 C36.1 C37.2 C38.1 C39.1 C40.2 C41.1 C42.2 C43.1 C44.2 C45.1 C46.1 C48.1 C49.2 C50.1 C51.1 C52.1 Control_in.1 Control_out.1 D2.1 D5.1 D7.2 HV_Out.2 HV_Out.3 J4.5 LCD.4 P2.3 pad.0@66.075,95.8 pad.0@67.525,94.25 pad.0@85.4,65.7 pad.0@85.4,68.2 pad.0@86.9,90.275 pad.0@87.075,81.3 pad.0@89.325,90.275 pad.0@89.575,81.3 pad.0@92.6,65.7 pad.0@92.6,68.2 Power_in.3 Power_in.4 Power_out.3 Power_out.4 PWR.2 R2.2 R3.2 R7.2 R8.1 R10.1 R14.1 R15.1 R17.1 R24.1 R29.1 R33.1 T1.8 U1.8 U1.23 U1.35 U1.47 U2.3 U3.1 U4.9 U4.10 U4.GND U5.5 U5.GND U6.2 U6.6 U7.2 U8.7 U9.2 U10.2 U10.3 U11.7 U12.2 U12.3 U13.2 U13.3 U14.7 | length 27.4
  Top Layer w0.254: v2@63.2,109.7 v2(63.275,109.775) ; 67.025,82.875 67.05,82.85 U1.47 71.45,82.85 71.65,82.65 ; 70.525,90.45 70.675,90.3 U1.35 70.675,85.775 70.7,85.75 ; C48.1@73.675,79.075 C48.1@73.9,78.85 ; C48.1@73.95,79.1 74.35,78.7 74.35,76.575 C4.1 ; 74.375,87.075 74.65,87.35 U1.23 79.025,87.35 79.575,86.8 ; U9.2 121.775,106.65 v2(122.975,105.45)
  Top Layer w0.3: C48.1@73.675,79.075 U1.8 73.675,84.025 73.75,84.1
  Bottom Layer w0.254: 118.55,97.1 119.05,97.6 U14.7
  other v1: 153.375,49.05 155.85,49.05 155.85,51.675 128.65,51.875 155.85,54.15 125.775,55.45 144.6,56.1 147.075,56.1 155.85,56.625 155.85,59.1 125.775,59.275 130.775,59.275 125.775,63.1 130.775,63.1 155.85,63.1 125.775,66.925 130.775,66.925 155.85,66.925 125.775,70.75 130.775,70.75 155.85,70.75 125.775,74.575 130.775,74.575 155.85,74.575 125.775,78.4 130.775,78.4 155.85,78.4 130.775,82.225 155.85,82.225 155.85,86.05 139.7,88.05 143.275,88.05 146.85,88.05 122.525,91.275 143.275,91.875 143.275,95.7 143.275,99.525 143.275,103.35 128.275,103.5 113.875,105.75 143.275,107.175 126.3,113.375
  other v2: 75.925,64.325 118.15,95.525 119.4,106.45
  other v3: 135.725,52.175 136.725,52.175 135.725,52.975 136.725,52.975
HVC+: R30.2 U10.1 U14.2 | length 11.2
  Top Layer w0.3: U10.1 126.05,93.5 126.55,94 R30.2@129.475,94
  Bottom Layer w0.3: U14.2 125.65,97.6 v2(129.475,93.775)
HVC-: R36.2 U13.1 U14.1 | length 7.3
  Top Layer w0.4: U13.1@128.15,99.2 v2(129.55,99.2)
  Bottom Layer w0.35: U14.1 128.6,98.25 v2(129.55,99.2)
HVV+: U9.1 U9.4 U14.3 | length 15.2
  Top Layer w0.35: v2(121.3,105.425) 120.825,105.9 U9.1 120.825,107.725 122.375,109.275 U9.4
  Bottom Layer w0.35: v2(121.3,105.425) 122.425,104.3 122.425,97.7 123.175,96.95 U14.3
HVV-: C47.1 R35.2 U12.1 U14.4 | length 15.1
  Top Layer w0.3: U12.1 117.25,99.775 118.125,100.65 118.125,103.05 R35.2 117.91,104.415 C47.1
  Bottom Layer w0.3: v2(116.35,98.5) 116.625,98.5 117.275,99.15 120.125,99.15 122.975,96.3 U14.4
NetC4_2: C4.2 R4.1 U1.7 | length 5.1
  Top Layer w0.3: C4.2@73.175,75.9 U1.7
NetC7_2: C7.2 C35.2 R19.2 R20.2 U2.2 U6.3 | length 10.6
  Bottom Layer w0.4: R19.2@117.25,76.125 118.05,75.325 119.025,75.325 119.025,75.375 120.325,75.375 ; 120.275,75.325 120.325,75.375 ; U2.2@120.325,73.775 120.325,75.375 ; U2.2 C7.2 ; C35.2@122.025,75.6 U6.3 ; C35.2@122.025,75.65 121.75,75.375 120.325,75.375
NetC9_2: C9.2 C15.2 C17.2 L5.2 LCD.1 Power_out.2 R6.2 U3.2 U4.1 | length 48.1
  Top Layer w0.3: C15.2 73.125,62.3 U4.1
  Top Layer w0.5: L5.2@71.85,60.75 v1(73.1,60.75) C15.2
  Bottom Layer w0.3: C17.2 73,63.1 R6.2 73.05,60.8 v1(73.1,60.75)
  Bottom Layer w0.5: U3.2 C9.2 70.05,60.75 v1(73.1,60.75)
  Bottom Layer w0.8: v1(73.1,60.75) 76.925,60.75 80.23,64.055 Power_out.2 ; 90.07,64.055 LCD.1
NetC12_2: C12.2 L4.1 Power_out.1 | length 17.5
  Top Layer w0.3: L4.1@80.725,60.05 L4.1
  Top Layer w0.5: L4.1@80.725,60.05 C12.2
  Bottom Layer w0.8: v1(81.95,60) 94.325,60 Power_out.1@95.875,61.55
NetC13_1: C13.1 L4.2 U4.4 U4.5 | length 3.9
  Top Layer w0.3: C13.1@78.975,61.775 C13.1
  Top Layer w0.4: U4.4@76.475,62.225 C13.1@78.575,62.225
  Top Layer w0.5: L4.2 C13.1@78.975,61.775
NetC14_1: C14.1 D2.2 L5.1 U4.3 | length 17.4
  Top Layer w0.3: 75.9,58.875 U4.3
  Top Layer w0.5: L5.1@67.875,60.4 70.55,57.725 75.7,57.725 76.075,58.1 C14.1@76.075,59.4 ; L5.1 68,61.5 D2.2
NetC14_2: C14.2 U4.2 | length 2.5
  Top Layer w0.3: C14.2@75.4,59.775 U4.2
NetC16_2: C16.2 U4.7 | length 2.8
  Top Layer w0.3: C16.2@76.375,69.15 76.4,69.125 U4.7
NetC17_1: C17.1 R6.1 R8.2 U4.6 | length 11.1
  Top Layer w0.3: U4.6 78.46,66.4 R8.2 ; 77.65,66.4 v2(77.65,67.825)
  Bottom Layer w0.3: C17.1 73,64.7 R6.1 73.075,64.775 73.075,65.65 75.25,67.825 v2(77.65,67.825)
NetC18_1: C18.1 C19.1 C50.2 D4.1 L6.2 T1.1 | length 6.2
  Top Layer w1: v1(140.45,59.025) 140.525,59 L6.2@140.525,58.125
  Bottom Layer w1: T1.1 135.775,60.95 136.25,60.475 ; D4.1@141.25,59.9 D4.1 D4.1@141.525,60.475
NetC20_2: C20.2 HV_Out.1 L1.2 | length 1
  Bottom Layer w1.2: HV_Out.1@136.4,114.3 HV_Out.1
NetC22_2: C22.2 D3.1 R9.1
NetC23_2: C23.2 R9.2 R11.1
NetC24_2: C24.2 R11.2 R27.1
NetC28_1: C28.1 R10.2 | length 1.8
  Top Layer w0.305: C28.1@132.525,56.975 134.285,56.975 R10.2@134.3,56.99
NetC28_2: C28.2 U5.1 | length 1.1
  Top Layer w0.305: C28.2@133.05,53.575 U5.1
NetC29_1: C29.1 U5.3 | length 2.9
  Top Layer w0.254: C29.1@131.3,52.475 131.4,52.575 U5.3
NetC30_2: C30.2 D6.2 R16.2 R31.1
NetC31_2: C31.2 R31.2 R37.1
NetC32_2: C32.2 R37.2 R38.1
NetC33_2: C33.2 HV_Out.4 L2.2 | length 1.6
  Top Layer w1.2: L2.2@155.4,108.1 v1(155.4,108.925)
  Bottom Layer w1.2: HV_Out.4 HV_Out.4@150.025,114.3
NetC34_2: C34.2 R13.1 U5.6 | length 7.4
  Top Layer w0.305: U5.6@138.3,51.47 138.3,49.775 C34.2@138.475,49.6
  Top Layer w0.5: C34.2@138.475,49.6 140.825,47.25 v2(140.825,46.8)
  Bottom Layer w0.305: v2(140.825,46.8) v2@140.925,46.7
  Bottom Layer w0.5: v2@140.925,46.7 R13.1
NetC36_2: C36.2 J4.6 J4.7 J4.8 J4.9 | length 11.5
  Top Layer w0.5: J4.7@53.35,107.475 53.425,107.4 C36.2 ; J4.9@53.35,117.325 J4.8@57.6,117.325
NetC38_2: C38.2 R28.1 R29.2 U9.3 | length 6.8
  Top Layer w0.35: U9.3 123.7,107.125 124.55,107.975 C38.2 128.25,108.825 R28.1
NetC43_2: C43.2 R32.1 R33.2 R34.2 | length 1.7
  Top Layer w0.7: R32.1 157.35,101.375 R33.2
NetC47_2: C47.2 R34.1 R35.1 U12.4 | length 5.4
  Top Layer w0.3: U12.4 U12.4@119.175,101.4
  Top Layer w0.4: U12.4@119.15,101.4 R34.1 ; C47.2@119.15,104.375 C47.2
  Top Layer w0.45: U12.4 C47.2@119.15,104.375
NetC51_2: C51.2 D8.1 L1.1 R28.2 U8.3 | length 0
NetC52_2: C52.2 D9.2 L2.1 R32.2 U11.2 | length 0.3
  Top Layer w0.7: L2.1 L2.1@155.7,105.925
NetControl_in_2: Control_in.2 U5.9 | length 4.4
  Top Layer w0.305: U5.9 138.975,53.075 139.675,53.775 v3(139.675,54.425)
  Bottom Layer w0.8: Control_in.2 108.215,84.85 110.3,84.85
  other v1: 110.075,72.75
NetControl_in_3: Control_in.3 R20.1 U6.4 U14.6 | length 35.2
  Top Layer w0.4: v2(119.125,76.825) 119.425,77.125 v2(119.425,80.225)
  Bottom Layer w0.3: U14.6 120.2,96.95 120.475,96.675 120.475,93.85
  Bottom Layer w0.4: 107.975,75.305 109.695,77.025 U6.4 ; v2(119.425,80.225) 119.425,92.8 120.475,93.85
NetControl_in_4: Control_in.4 R19.1 U6.5 U14.5 | length 32.6
  Bottom Layer w0.3: 118.75,93.9 118.75,94 119.55,94.8 U14.5
  Bottom Layer w0.4: R19.1@117.25,77.85 117.25,80.1 118.725,81.575 118.725,93.875 118.75,93.9
  Bottom Layer w0.5: 108.155,78.025 121.05,78.025 U6.5 ; Control_in.4 Control_in.4@108.38,90.125
NetControl_out_2: Control_out.2 U1.18 | length 18.9
  Top Layer w0.3: U1.18 79.375,84.85 v2(79.4,84.825)
  Bottom Layer w0.5: v2(79.4,84.825) 95.85,84.825 Control_out.2@95.875,84.85
NetControl_out_3: Control_out.3 R40.2 U1.43 | length 39.1
  Top Layer w0.3: v2(64.175,84.175) 64.85,84.85 U1.43
  Bottom Layer w0.3: R40.2@64.175,82.9 R40.2 v2(64.175,84.175)
  Bottom Layer w0.5: v2(64.175,84.175) 65.8,84.175 68.575,86.95 Control_out.3@95.9,86.95
NetControl_out_4: Control_out.4 R39.2 U1.42 | length 43.1
  Top Layer w0.3: v2(62.375,85.3) 62.375,85.325 62.4,85.35 U1.42
  Bottom Layer w0.3: v2(62.375,85.3) 62.375,84.25 R39.2@62.4,84.225
  Bottom Layer w0.5: v2(62.375,85.3) 65.375,85.3 68.025,87.95 92.375,87.95 94.385,89.96 Control_out.4
NetD3_2: D3.2 T1.6 | length 0.1
  Bottom Layer w1.2: D3.2 D3.2@153.4,91.425
NetD4_2: D4.2 D5.2 | length 3.6
  Bottom Layer w0.85: D4.2@146.2,60 D5.2@149.6,60
  Bottom Layer w1: D4.2@146.075,60.125 D4.2@146.2,60
NetD5_3: D5.3 Q1.5 T1.5 | length 9.2
  Bottom Layer w0.6: D5.3 150.775,56.4 Q1.5
  Bottom Layer w1: D5.3 T1.5
NetD6_1: D6.1 T1.10
NetD7_1: D7.1 R25.1 | length 3.2
  Top Layer w0.5: D7.1@58.975,104.3 61.225,104.3 R25.1
NetD8_2: D8.2 R38.2 U8.2
NetD9_1: D9.1 R27.2 U11.3
NetJ4_1: J4.1 L7.2 | length 12.7
  Top Layer w0.5: J4.1@57.7,114 67.6,114 68.95,112.65 L7.2
NetJ4_2: J4.2 U7.1 | length 10.9
  Top Layer w0.5: J4.2@57.7,113.2 66.775,113.2 67.25,112.725 U7.1
NetJ4_3: J4.3 U7.3 | length 8
  Top Layer w0.5: J4.3@57.7,112.4 63.275,112.4 64.15,111.525 U7.3 U7.3@65.375,111.55
NetJ4_4: J4.4 R24.2 | length 3.8
  Top Layer w0.5: J4.4@57.7,111.6 R24.2@61.5,111.6
NetLCD_2: LCD.2 U1.12 | length 18.3
  Top Layer w0.3: U1.12 78.075,81.05 ; v2@87.4,75.675 v2(87.625,75.9)
  Top Layer w0.4: 78.075,81.05 83.45,75.675 v2@87.4,75.675
  Bottom Layer w0.4: LCD.2 LCD.2@87.625,71.955
  Bottom Layer w0.6: LCD.2@87.625,71.955 v2(87.625,75.9)
NetLCD_3: LCD.3 U1.13 | length 15.4
  Top Layer w0.3: U1.13 78.35,82.35
  Top Layer w0.4: 78.35,82.35 83.75,76.95 v2(85.1,76.95)
  Bottom Layer w0.3: LCD.3 LCD.3@85.1,71.93
  Bottom Layer w0.6: LCD.3@85.1,71.93 v2(85.1,76.95)
NetPWR_1: PWR.1 R5.1 | length 2
  Top Layer w0.3: PWR.1 64.225,79.6 R5.1
NetQ1_1: Q1.1 Q1.2 Q1.3 R13.2 R14.2 | length 10.4
  Bottom Layer w0.4: R13.2@145.025,47.2 145.025,50 R14.2
  Bottom Layer w0.6: R13.2@145.025,47.2 R13.2@145.525,46.7
  Bottom Layer w1: R14.2 149.525,50 150.837,51.312 151.337,51.312
NetQ1_4: Q1.4 R12.2 | length 2.8
  Bottom Layer w0.5: R12.2 148.925,53.275 149.47,52.73 Q1.4
NetQ2_1: Q2.1 R26.1 U1.29 | length 19.4
  Top Layer w0.3: Q2.1 63.575,99.075 R26.1 65.175,98.975 70.25,93.9 v2(70.25,93.4) ; U1.29 v2(73.675,91.5)
  Bottom Layer w0.4: v2(70.25,93.4) 71.775,93.4 v2(73.675,91.5)
NetQ2_3: Q2.3 R23.1 R25.2 | length 6.6
  Top Layer w0.5: Q2.3 62.625,103.2 63.6,104.175 R23.1
NetR2_1: R2.1 U1.44 | length 2.9
  Top Layer w0.3: R2.1 66.425,84.35 U1.44
NetR7_1: R7.1 U4.8 | length 1.6
  Top Layer w0.3: R7.1@75.665,67.9 75.9,67.665 U4.8
NetR12_1: R12.1 U5.7 | length 7.7
  Top Layer w0.305: U5.7 143.275,52.075 v2(144.45,53.25)
  Bottom Layer w0.305: v2(144.45,53.25) 145.4,53.25 R12.1@145.45,53.3
NetR15_2: R15.2 U5.4 | length 1.6
  Top Layer w0.305: R15.2@132.675,51.84 132.91,52.075 U5.4
NetR16_1: R16.1 R17.2 R18.2 U5.2 | length 36.7
  Top Layer w0.3: 130.6,53.075 U5.2
  Top Layer w0.8: v2(126.5,84.425) 128.325,82.6 128.325,55.35 130.375,53.3
  Bottom Layer w0.6: R17.2 R17.2@126.475,86 ; R16.1@126.475,87.95 R16.1
NetR18_1: R18.1 U6.1 | length 4.1
  Bottom Layer w0.8: U6.1@123.45,79.2 123.45,79.725 124.825,81.1 R18.1
NetR21_1: R21.1 U7.6 | length 3.8
  Top Layer w0.5: R21.1 U7.6
NetR21_2: R21.2 U1.32 | length 16.2
  Top Layer w0.3: R21.2 67.25,99.45 72.175,94.525 U1.32
NetR22_1: R22.1 R23.2 U7.4 | length 3.9
  Top Layer w0.5: R22.1 65.225,106.675 R23.2 65.35,106.8 U7.4
NetR22_2: R22.2 U1.33 | length 16.8
  Top Layer w0.3: R22.2 65.225,100.225 71.675,93.775 71.675,92.4 U1.33
NetR30_1: R30.1 U8.8 U10.4 | length 1.5
  Top Layer w0.4: U10.4@128,95.425 R30.1
NetR36_1: R36.1 U11.8 U13.4 | length 4.2
  Top Layer w0.3: U13.4 127.125,98.075 128.975,98.075 R36.1
SWC: P2.2 R3.1 U1.37 | length 12.1
  Top Layer w0.3: v2(64.4,87.35) 64.9,87.85 U1.37
  Bottom Layer w0.3: P2.2 61.88,91.795 64.425,89.25 64.425,87.325 v2(64.4,87.35) R3.1
SWD: P2.4 R1.2 U1.34 | length 14
  Top Layer w0.3: v2(70.6,91.525) 70.875,91.525 71.179,91.221 71.179,89.154 U1.34
  Bottom Layer w0.3: P2.4 P2.4@63.76,92.465 ; v2(70.6,91.525) 70.8,91.525 71.025,91.75 v2@70.98,91.795
  Bottom Layer w0.4: R1.2 P2.4@63.76,92.465 ; P2.4 v2@70.98,91.795
VC_USB: L7.1 U7.5 | length 3.6
  Top Layer w0.5: U7.5 66.3,109.6 66.7,110 L7.1
XTAL1: C2.2 U1.5 X1.3 | length 12.4
  Top Layer w0.3: C2.2 70.475,71.975 X1.3 71.125,71.95 72.175,73 U1.5
XTAL2: C1.2 U1.6 X1.1 | length 11.1
  Top Layer w0.3: U1.6 72.675,74.9 73.125,74.45 74.725,74.45 X1.1 C1.2@77.475,74.45
pads on no net: J4.H1 J4.H2 P2.20 T1.2 T1.3 T1.4 T1.7 T1.9 U1.2 U1.3 U1.4 U1.10 U1.11 U1.14 U1.15 U1.16 U1.17 U1.19 U1.20 U1.21 U1.22 U1.25 U1.26 U1.27 U1.28 U1.30 U1.31 U1.38 U1.39 U1.40 U1.41 U1.45 U1.46 U3.4 U3.5 U8.1 U8.4 U8.5 U8.6 U11.1 U11.4 U11.5 U11.6 X1.2 X1.4

## Polygon pours and split planes (outlines as drawn)
GND on Top Layer "GND" (solid, remove dead copper, pour order 11): 101.475,136.7 101.475,36.8 51.2,36.8 51.2,136.7
GND on Top Layer "Top Layer-No Net" (solid, remove dead copper, shelved, pour order 12): 102.45,136.7 171.2,136.7 171.2,36.8 102.45,36.8
GND on Bottom Layer "GND" (solid, remove dead copper, pour order 13): 51.2,136.7 51.2,36.7 101.45,36.7 101.45,136.7
GND on Bottom Layer "Top Layer-No Net" (solid, remove dead copper, shelved, pour order 14): 102.45,36.8 171.2,36.8 171.2,136.7 102.45,136.7

## Keep-outs
Keep-Out Layer:
  lines w0.254: 51.2,36.8 51.2,136.7 99.4,136.7 171.2,136.7 171.2,36.8 99.55,36.8 51.2,36.8 ; 101.45,36.8 101.45,136.7 102.45,136.7 102.45,36.825 102.425,36.8 101.45,36.8

## Other copper
Top Layer:
  text "SE-HV00-02" at 72.05,44.1 h1.52
  text "SE-HV00-02" at 112.925,44 h1.52
Bottom Layer:
  rectangle net NetC18_1: 135,57.425 143.2,61.625
  rectangle net NetQ1_1: 150.5,50.825 153.55,53

## Text inside footprints (layer, text, board x,y; h text height)
J4: Top Overlay "1" at 60.4,113.65 h1; Mechanical 15 "1" at 59.4,113.65 h1
P2: Top Overlay "1" at 57.41,88.061 h1